# Altium PCB SPCE061A最小系统.PcbDoc (part 2 of 2)
Units mm, origin at the board's own origin, x right, y up, seen from the top; angles counter-clockwise.
Board outline 152.4 x 101.6 mm, 2 copper layers (Top Layer, Bottom Layer); 47 components, 59 nets, 230 pads, 3 vias.
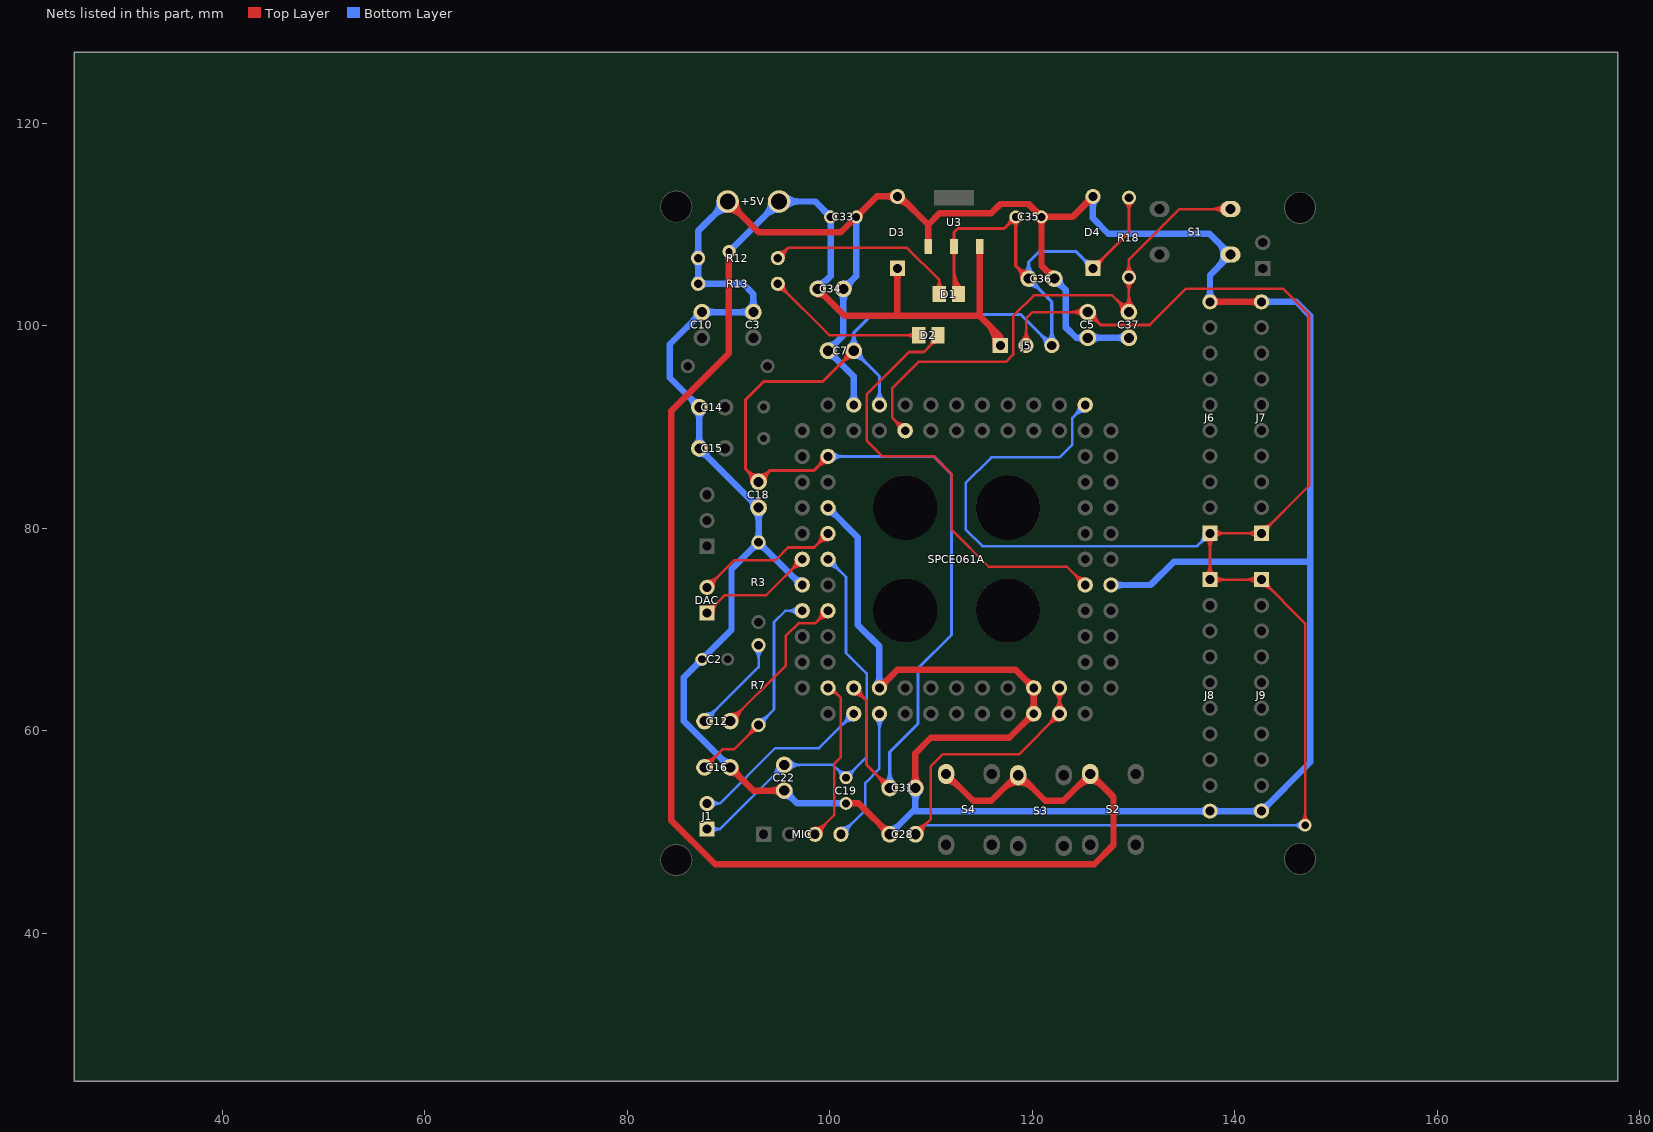
[diagram p2: the nets of this part, all layers, seen from the top]

## Via types
v1: diameter 1.27, hole 0.711, Top Layer to Bottom Layer, 3 vias

## Nets (pads, with @x,y where several pads share a name; then routed paths per layer and width w, separated by ;. In a path a pad name is that pad's centre, name@x,y a point inside that pad or via, vN(x,y) a via of type N, cw(c..) or ccw(c..) an arc to the next point about the centre after c; other vN are vias at no path point) (continued)
NetC12_1: C12.1 SPCE061A.27 | length 24.1
  Top Layer w0.254: C12.1@90.17,60.96 95.631,66.421 95.631,69.342 96.901,70.612 98.552,70.612 99.797,71.857 SPCE061A.27@99.822,71.857 ; C12.1@90.17,61.404 ccw(c90.17,62.476) 90.928,61.718 ccw(c91.686,60.96) C12.1@90.614,60.96 ; C12.1@90.17,61.658 ccw(c90.17,63.343) 91.362,62.152 ccw(c92.553,60.96) C12.1@90.868,60.96 ; 98.695,70.755 cw(c99.822,69.627) SPCE061A.27@99.822,71.222 ; 98.756,70.816 ccw(c97.715,71.857) SPCE061A.27@99.187,71.857 ; 99.128,71.188 cw(c99.822,70.494) SPCE061A.27@99.822,71.476 ; 99.19,71.25 ccw(c98.583,71.857) SPCE061A.27@99.441,71.857
NetC12_2: C12.2 R7.2 | length 17.4
  Bottom Layer w0.254: C12.2@87.63,60.96 92.964,66.294 R7.2@92.964,68.453 ; C12.2@87.63,61.404 ccw(c87.63,62.476) 88.388,61.718 ccw(c89.146,60.96) C12.2@88.074,60.96 ; C12.2@87.63,61.658 ccw(c87.63,63.343) 88.822,62.152 ccw(c90.013,60.96) C12.2@88.328,60.96 ; R7.2@92.559,68.048 cw(c91.581,67.07) 92.964,67.07 cw(c94.347,67.07) R7.2@93.369,68.048 ; R7.2@92.738,68.227 cw(c92.194,67.683) 92.964,67.683 cw(c93.734,67.683) R7.2@93.19,68.227
NetC16_1: C16.1 R7.1 SPCE061A.26 | length 36.1
  Top Layer w0.254: C16.1@87.63,56.388 89.408,58.166 90.551,58.166 R7.1@92.964,60.579 ; C16.1@87.63,56.832 ccw(c87.63,57.904) 88.388,57.146 ccw(c89.146,56.388) C16.1@88.074,56.388 ; C16.1@87.63,57.086 ccw(c87.63,58.771) 88.822,57.58 ccw(c90.013,56.388) C16.1@88.328,56.388 ; R7.1@92.391,60.579 cw(c91.008,60.579) 91.986,59.601 cw(c92.964,58.623) R7.1@92.964,60.006 ; R7.1@92.645,60.579 cw(c91.875,60.579) 92.419,60.034 cw(c92.964,59.49) R7.1@92.964,60.26
  Bottom Layer w0.254: R7.1@92.964,60.579 94.488,62.103 94.488,70.739 95.606,71.857 SPCE061A.26@97.282,71.857 ; R7.1@92.964,60.898 ccw(c92.964,61.668) 93.509,61.124 ccw(c94.053,60.579) R7.1@93.283,60.579 ; R7.1@92.964,61.152 ccw(c92.964,62.535) 93.942,61.557 ccw(c94.92,60.579) R7.1@93.537,60.579 ; SPCE061A.26@96.833,71.408 ccw(c95.749,70.324) 95.749,71.857 ccw(c95.749,73.39) SPCE061A.26@96.833,72.306 ; SPCE061A.26@97.013,71.587 ccw(c96.362,70.937) 96.362,71.857 ccw(c96.362,72.776) SPCE061A.26@97.013,72.126
NetC37_1: C37.1 R18.1 S1.1@139.565,111.521 SPCE061A.6 | length 75.5
  Top Layer w0.254: SPCE061A.6@106.807,89.637 ccw(c105.274,89.637) 106.358,90.721 ccw(c107.442,91.805) SPCE061A.6@107.442,90.272 ; SPCE061A.6@107.061,89.637 ccw(c106.141,89.637) 106.792,90.287 ccw(c107.442,90.937) SPCE061A.6@107.442,90.018 ; SPCE061A.6@107.442,89.637 106.172,90.907 106.172,93.853 108.75,96.431 117.386,96.431 118.11,97.155 118.11,100.965 120.142,102.997 127.889,102.997 C37.1@129.54,101.346 129.54,106.553 134.508,111.521 S1.1@139.565,111.521 ; C37.1@128.842,101.346 ccw(c127.157,101.346) 128.348,102.538 ccw(c129.54,103.729) C37.1@129.54,102.044 ; C37.1@129.046,101.84 ccw(c127.855,103.031) 129.54,103.031 ccw(c131.225,103.031) C37.1@130.034,101.84 ; C37.1@129.096,101.346 ccw(c128.024,101.346) 128.782,102.104 ccw(c129.54,102.862) C37.1@129.54,101.79 ; R18.1@129.135,104.37 cw(c128.157,103.392) 129.54,103.392 cw(c130.923,103.392) R18.1@129.945,104.37 ; R18.1@129.135,105.18 ccw(c128.157,106.158) 129.54,106.158 ccw(c130.923,106.158) R18.1@129.945,105.18 ; C37.1@129.226,101.66 ccw(c128.468,102.418) 129.54,102.418 ccw(c130.612,102.418) C37.1@129.854,101.66 ; R18.1@129.314,104.549 cw(c128.77,104.005) 129.54,104.005 cw(c130.31,104.005) R18.1@129.766,104.549 ; R18.1@129.314,105.001 ccw(c128.77,105.545) 129.54,105.545 ccw(c130.31,105.545) R18.1@129.766,105.001 ; S1.1@138.889,111.045 ccw(c137.74,109.896) 137.74,111.521 ccw(c137.74,113.146) S1.1@138.889,111.997 ; S1.1@139.069,111.225 ccw(c138.353,110.509) 138.353,111.521 ccw(c138.353,112.532) S1.1@139.069,111.817
NetD1_2: D1.2 R12.1 | length 24.4
  Top Layer w0.254: R12.1@94.869,106.68 95.885,107.696 107.635,107.696 110.81,104.521 ; R12.1@94.869,106.999 ccw(c94.869,107.769) 95.414,107.225 ccw(c95.958,106.68) R12.1@95.188,106.68 ; R12.1@94.869,107.253 ccw(c94.869,108.636) 95.847,107.658 ccw(c96.825,106.68) R12.1@95.442,106.68 ; D1.2@110.443,103.647 ccw(c109.585,104.521) 110.81,104.521 ; D1.2@110.81,103.124 110.81,104.521 ; D1.2@111.177,103.647 cw(c112.035,104.521) 110.81,104.521
NetD2_2: D2.2 R13.1 | length 21.4
  Top Layer w0.254: R13.1@94.869,103.567 cw(c94.869,102.184) 95.847,103.162 cw(c96.825,104.14) R13.1@95.442,104.14 ; R13.1@94.869,103.821 cw(c94.869,103.051) 95.414,103.595 cw(c95.958,104.14) R13.1@95.188,104.14 ; R13.1@94.869,104.14 99.949,99.06 D2.2@108.778,99.06 ; D2.2@108.408,98.69 ccw(c107.515,97.797) 107.515,99.06 ccw(c107.515,100.323) D2.2@108.408,99.43
NetDAC_input_1: DAC.1 SPCE061A.22 | length 19.2
  Top Layer w0.254: DAC.1@87.884,71.628 89.662,73.406 93.726,73.406 97.257,76.937 SPCE061A.22@97.282,76.937 ; DAC.1@87.884,71.997 ccw(c87.884,72.888) 88.514,72.258 ccw(c89.144,71.628) DAC.1@88.253,71.628 ; DAC.1@87.884,72.251 ccw(c87.884,73.755) 88.948,72.692 ccw(c90.011,71.628) DAC.1@88.507,71.628 ; 96.155,75.835 cw(c97.282,74.707) SPCE061A.22@97.282,76.302 ; 96.216,75.896 ccw(c95.175,76.937) SPCE061A.22@96.647,76.937 ; 96.588,76.268 cw(c97.282,75.574) SPCE061A.22@97.282,76.556 ; 96.65,76.33 ccw(c96.043,76.937) SPCE061A.22@96.901,76.937
NetDAC_input_2: DAC.2 SPCE061A.21 | length 21.8
  Top Layer w0.254: DAC.2@87.884,74.168 90.551,76.835 94.615,76.835 95.885,78.105 98.45,78.105 SPCE061A.21@99.822,79.477 ; DAC.2@87.884,74.537 ccw(c87.884,75.428) 88.514,74.798 ccw(c89.144,74.168) DAC.2@88.253,74.168 ; DAC.2@87.884,74.791 ccw(c87.884,76.295) 88.948,75.232 ccw(c90.011,74.168) DAC.2@88.507,74.168 ; SPCE061A.21@99.187,79.477 cw(c97.654,79.477) 98.738,78.393 cw(c99.822,77.309) SPCE061A.21@99.822,78.842 ; SPCE061A.21@99.441,79.477 cw(c98.521,79.477) 99.172,78.826 cw(c99.822,78.176) SPCE061A.21@99.822,79.096
NetJ1_2: J1.2 SPCE061A.35 | length 24.9
  Bottom Layer w0.254: J1.2@87.884,52.832 89.154,52.832 ; J1.2@88.176,52.606 cw(c88.636,52.25) 88.636,52.832 cw(c88.636,53.414) J1.2@88.176,53.058 ; J1.2@88.377,52.451 cw(c89.154,51.849) 89.154,52.832 ; J1.2@88.377,53.213 ccw(c89.154,53.815) 89.154,52.832 ; 101.235,60.595 cw(c102.362,59.467) SPCE061A.35@102.362,61.062 ; 101.296,60.656 ccw(c100.255,61.697) SPCE061A.35@101.727,61.697 ; 101.668,61.028 cw(c102.362,60.334) SPCE061A.35@102.362,61.316 ; 101.73,61.09 ccw(c101.123,61.697) SPCE061A.35@101.981,61.697 ; SPCE061A.35@102.362,61.697 102.337,61.697 98.933,58.293 94.615,58.293 89.154,52.832
SLEEP: D2.1 SPCE061A.63 | length 51.5
  Top Layer w0.254: 109.712,97.84 ccw(c108.641,98.91) D2.1@110.155,98.91 ; 109.963,98.091 cw(c110.678,97.375) D2.1@110.678,98.387 ; D2.1@110.145,98.273 ccw(c109.509,98.91) D2.1@110.409,98.91 ; D2.1@110.678,99.06 110.678,98.806 109.281,97.409 107.823,97.409 103.632,93.218 103.632,88.646 105.156,87.122 110.236,87.122 112.047,85.311 112.047,79.85 115.697,76.2 123.444,76.2 125.222,74.422 SPCE061A.63@125.222,74.397 ; 124.12,75.524 cw(c122.993,74.397) SPCE061A.63@124.587,74.397 ; 124.181,75.463 ccw(c125.222,76.503) SPCE061A.63@125.222,75.032 ; 124.554,75.09 cw(c123.86,74.397) SPCE061A.63@124.841,74.397 ; 124.615,75.029 ccw(c125.222,75.636) SPCE061A.63@125.222,74.778
  Bottom Layer w0.254: SPCE061A.63@125.222,74.397 SPCE061A.63@125.222,74.422
V5: +5V.2 C33.1 C34.2 D3.2 J5.1 S2.1@125.715,55.745 S3.1@118.603,55.618 S4.1@111.491,55.745 U3.3 | length 213.2
  Top Layer w0.635: v1@89.818,107.09 cw(c89.276,106.548) 90.043,106.548 cw(c90.81,106.548) v1@90.268,107.09 ; v1(90.043,107.315) 90.043,97.282 84.328,91.567 84.328,51.181 88.692,46.817 126.111,46.817 128.016,48.722 128.016,53.467 125.738,55.745 S2.1@125.715,55.745 123.056,53.086 121.285,53.086 S3.1@118.626,55.745 ; C34.2@98.806,103.124 cw(c98.806,101.899) 99.672,102.766 cw(c100.539,103.632) C34.2@99.314,103.632 ; C34.2@98.806,103.632 101.473,100.965 114.808,100.965 ; D3.2@106.374,105.364 cw(c105.636,104.626) 106.68,104.626 cw(c107.724,104.626) D3.2@106.986,105.364 ; 106.68,100.965 D3.2@106.68,105.67 ; S4.1@111.491,55.062 cw(c111.491,53.36) 112.695,54.564 ; S4.1@111.514,55.745 114.173,53.086 115.944,53.086 118.603,55.745 S3.1@118.603,55.738 ; U3.3@114.808,107.823 114.808,100.965 ; 115.473,100.3 cw(c113.217,98.044) J5.1@116.408,98.044 ; 116.557,99.216 cw(c115.385,98.044) J5.1@117.043,98.044 ; J5.1@116.573,98.384 ccw(c116.143,98.933) 116.84,98.933 ; J5.1@116.84,98.044 116.84,98.933 ; J5.1@117.107,98.384 cw(c117.537,98.933) 116.84,98.933 ; 117.221,54.363 cw(c118.603,52.981) 118.603,54.935 cw(c118.603,52.926) 120.024,54.347 ; 124.55,54.58 cw(c125.715,53.415) 125.715,55.062 cw(c125.715,53.36) 126.919,54.564 ; 125.033,55.063 ccw(c124.551,55.545) S2.1@125.233,55.545 ; 114.808,100.965 116.84,98.933
  Bottom Layer w0.635: v1(90.043,107.315) +5V.2@94.996,112.268 98.552,112.268 C33.1@100.076,110.744 100.076,104.902 C34.2@98.806,103.632 ; v1@90.043,107.632 ccw(c90.043,108.399) 90.585,107.857 ccw(c91.127,107.315) v1@90.361,107.315 ; +5V.2@94.202,112.268 cw(c92.283,112.268) 93.64,110.912 cw(c94.996,109.555) +5V.2@94.996,111.474 ; +5V.2@95.558,111.706 cw(c96.914,110.35) 96.914,112.268 cw(c96.914,114.186) +5V.2@95.558,112.83 ; C34.2@98.806,104.14 ccw(c98.806,105.365) 99.672,104.498 ccw(c100.539,103.632) C34.2@99.314,103.632 ; C33.1@99.758,110.744 ccw(c98.992,110.744) 99.534,111.286 ccw(c100.076,111.828) C33.1@100.076,111.061 ; C33.1@99.851,110.519 cw(c99.309,109.977) 100.076,109.977 cw(c100.843,109.977) C33.1@100.301,110.519
VCM: MIC.3 SPCE061A.34 | length 22
  Top Layer w0.254: MIC.3@98.425,49.53 MIC.3@98.425,49.784 ; MIC.3@98.552,49.784 100.433,51.665 100.433,56.745 101.092,57.404 101.092,63.246 100.101,64.237 SPCE061A.34@99.822,64.237 ; MIC.3@98.552,50.153 ccw(c98.552,51.044) 99.182,50.414 ccw(c99.812,49.784) MIC.3@98.921,49.784 ; MIC.3@98.552,50.407 ccw(c98.552,51.911) 99.616,50.848 ccw(c100.679,49.784) MIC.3@99.175,49.784 ; SPCE061A.34@99.854,63.857 cw(c99.957,62.607) 100.844,63.494 ; SPCE061A.34@100.457,64.237 ccw(c101.315,64.237) 100.708,63.63
VDD: C7.2 C18.2 C31.2 C35.1 C36.2 D1.1 D4.2 J5.3 R18.2 SPCE061A.7 SPCE061A.15 SPCE061A.36 U3.2 | length 232.1
  Top Layer w0.305: C18.2@92.291,84.582 ccw(c90.668,84.582) 91.816,85.73 ccw(c92.964,86.878) C18.2@92.964,85.255 ; C18.2@92.596,84.582 ccw(c91.708,84.582) 92.336,85.21 ccw(c92.964,85.838) C18.2@92.964,84.95 ; C18.2@92.965,84.95 ccw(c92.968,85.828) 93.589,85.207 ccw(c94.21,84.586) C18.2@93.332,84.583 ; C18.2@92.966,85.255 ccw(c92.971,86.86) 94.107,85.725 ; C18.2@93.637,84.584 cw(c95.242,84.589) 94.107,85.725 ; SPCE061A.15@99.212,87.097 cw(c97.741,87.097) 98.781,86.056 cw(c99.822,85.015) SPCE061A.15@99.822,86.487 ; SPCE061A.15@99.822,87.097 98.45,85.725 94.107,85.725 ; C7.2@101.689,97.536 cw(c100.066,97.536) 101.214,96.388 cw(c102.362,95.24) C7.2@102.362,96.863 ; C7.2@101.994,97.536 cw(c101.106,97.536) 101.734,96.908 cw(c102.362,96.28) C7.2@102.362,97.168 ; SPCE061A.36@102.362,63.627 cw(c102.362,62.094) 103.446,63.178 ; SPCE061A.36@102.362,63.932 cw(c102.362,63.135) 102.926,63.698 ; SPCE061A.36@102.362,64.237 102.387,64.237 103.632,62.992 103.632,56.642 C31.2@105.918,54.356 ; C7.2@102.362,97.536 99.314,94.488 93.472,94.488 91.694,92.71 91.694,85.852 C18.2@92.964,84.582 94.107,85.725 ; SPCE061A.36@102.972,64.237 ccw(c104.382,64.237) 103.385,63.239 ; SPCE061A.7@104.877,92.177 SPCE061A.7@104.902,92.177 ; C31.2@105.245,54.356 ccw(c103.622,54.356) 104.77,55.504 ccw(c105.918,56.652) C31.2@105.918,55.029 ; C31.2@105.55,54.356 ccw(c104.662,54.356) 105.29,54.984 ccw(c105.918,55.612) C31.2@105.918,54.724 ; U3.2@112.106,107.28 cw(c111.716,106.89) 112.268,106.89 cw(c112.82,106.89) U3.2@112.43,107.28 ; U3.2@112.106,108.366 ccw(c111.716,108.756) 112.268,108.756 ccw(c112.82,108.756) U3.2@112.43,108.366 ; 112.268,104.071 ccw(c113.507,104.071) D1.1@112.631,103.195 ; 112.268,104.807 ccw(c114.243,104.807) D1.1@112.846,103.41 ; 112.268,105.542 ccw(c114.978,105.542) D1.1@113.062,103.626 ; D1.1@112.71,103.124 112.268,103.566 112.268,109.22 112.653,109.605 117.225,109.605 C35.1@118.364,110.744 118.364,105.918 C36.2@119.634,104.648 ; C35.1@117.881,110.744 cw(c116.716,110.744) 117.54,109.92 cw(c118.364,109.096) C35.1@118.364,110.261 ; C35.1@118.023,110.403 cw(c117.199,109.579) 118.364,109.579 cw(c119.529,109.579) C35.1@118.705,110.403 ; C36.2@118.961,104.648 ccw(c117.338,104.648) 118.486,105.796 ccw(c119.634,106.944) C36.2@119.634,105.321 ; C36.2@119.266,104.648 ccw(c118.378,104.648) 119.006,105.276 ccw(c119.634,105.904) C36.2@119.634,105.016 ; D4.2@125.984,105.67 129.54,109.226 R18.2@129.54,112.649 ; D4.2@125.984,106.268 ccw(c125.984,107.71) 127.004,106.69 ccw(c128.024,105.67) D4.2@126.582,105.67 ; R18.2@129.153,112.262 cw(c128.218,111.327) 129.54,111.327 cw(c130.862,111.327) R18.2@129.927,112.262
  Bottom Layer w0.305: SPCE061A.15@99.822,87.097 110.261,87.097 112.014,85.344 112.014,69.469 108.712,66.167 108.712,60.706 105.918,57.912 C31.2@105.918,54.356 ; SPCE061A.15@100.253,86.666 cw(c101.294,85.625) 101.294,87.097 cw(c101.294,88.568) SPCE061A.15@100.253,87.528 ; C7.2@101.886,98.012 ccw(c100.738,99.16) 102.362,99.16 ccw(c103.986,99.16) C7.2@102.838,98.012 ; C7.2@102.102,97.796 ccw(c101.474,98.424) 102.362,98.424 ccw(c103.25,98.424) C7.2@102.622,97.796 ; C7.2@102.362,96.863 cw(c102.362,95.24) 103.51,96.388 cw(c104.658,97.536) C7.2@103.035,97.536 ; C7.2@102.362,97.168 cw(c102.362,96.28) 102.99,96.908 cw(c103.618,97.536) C7.2@102.73,97.536 ; SPCE061A.7@104.471,92.608 ccw(c103.43,93.648) 104.902,93.648 ccw(c106.374,93.648) SPCE061A.7@105.333,92.608 ; SPCE061A.7@104.902,92.177 104.902,94.996 C7.2@102.362,97.536 102.362,99.314 104.14,101.092 118.872,101.092 J5.3@121.92,98.044 121.92,102.362 C36.2@119.634,104.648 ; C31.2@105.442,54.832 ccw(c104.294,55.98) 105.918,55.98 ccw(c107.542,55.98) C31.2@106.394,54.832 ; C31.2@105.658,54.616 ccw(c105.03,55.244) 105.918,55.244 ccw(c106.806,55.244) C31.2@106.178,54.616 ; C36.2@119.158,105.124 ccw(c118.01,106.272) 119.634,106.272 ccw(c121.258,106.272) C36.2@120.11,105.124 ; C36.2@119.374,104.908 ccw(c118.746,105.536) 119.634,105.536 ccw(c120.522,105.536) C36.2@119.894,104.908 ; C36.2@119.634,103.975 cw(c119.634,102.352) 120.782,103.5 cw(c121.93,104.648) C36.2@120.307,104.648 ; C36.2@119.634,104.28 cw(c119.634,103.392) 120.262,104.02 cw(c120.89,104.648) C36.2@120.002,104.648 ; C36.2@119.761,104.648 C36.2@119.634,104.648 ; J5.3@121.322,98.044 ccw(c119.88,98.044) 120.9,99.064 ccw(c121.92,100.084) J5.3@121.92,98.642 ; J5.3@121.497,98.467 ccw(c120.477,99.487) 121.92,99.487 ccw(c123.363,99.487) J5.3@122.343,98.467 ; D4.2@125.386,105.67 ccw(c123.944,105.67) 124.964,106.69 ccw(c125.984,107.71) D4.2@125.984,106.268 ; D4.2@125.984,105.67 124.339,107.315 120.65,107.315 119.634,106.299 C36.2@119.634,104.648
VDDH: C5.2 C28.2 J5.2 J6.1 J7.1 J8.1 J9.1 SPCE061A.51 SPCE061A.52 SPCE061A.75 | length 279.8
  Top Layer w0.254: C28.2@108.458,49.784 109.982,51.308 109.982,56.515 111.144,57.677 118.662,57.677 SPCE061A.51@122.682,61.697 SPCE061A.52@122.682,64.237 ; C28.2@108.458,50.228 ccw(c108.458,51.3) 109.216,50.542 ccw(c109.974,49.784) C28.2@108.902,49.784 ; C28.2@108.458,50.482 ccw(c108.458,52.167) 109.65,50.976 ccw(c110.841,49.784) C28.2@109.156,49.784 ; J5.2@118.939,98.485 ccw(c117.876,99.548) 119.38,99.548 ccw(c120.884,99.548) J5.2@119.821,98.485 ; J5.2@119.119,98.305 ccw(c118.489,98.935) 119.38,98.935 ccw(c120.271,98.935) J5.2@119.641,98.305 ; J5.2@119.38,98.044 119.38,100.711 120.015,101.346 C5.2@125.476,101.346 126.746,100.076 131.572,100.076 135.128,103.632 144.78,103.632 147.32,101.092 147.32,84.201 J7.1@142.621,79.502 J6.1@137.541,79.502 J8.1@137.541,74.93 J9.1@142.621,74.93 146.939,70.612 v1(146.939,50.673) ; SPCE061A.51@122.047,61.697 cw(c120.514,61.697) 121.598,60.613 cw(c122.682,59.529) SPCE061A.51@122.682,61.062 ; SPCE061A.51@122.233,62.146 ccw(c121.149,63.23) 122.682,63.23 ccw(c124.215,63.23) SPCE061A.51@123.131,62.146 ; SPCE061A.52@122.233,63.788 cw(c121.149,62.704) 122.682,62.704 cw(c124.215,62.704) SPCE061A.52@123.131,63.788 ; SPCE061A.51@122.301,61.697 cw(c121.381,61.697) 122.032,61.046 cw(c122.682,60.396) SPCE061A.51@122.682,61.316 ; SPCE061A.51@122.413,61.966 ccw(c121.762,62.616) 122.682,62.616 ccw(c123.602,62.616) SPCE061A.51@122.951,61.966 ; SPCE061A.52@122.413,63.967 cw(c121.762,63.317) 122.682,63.317 cw(c123.602,63.317) SPCE061A.52@122.951,63.967 ; C5.2@124.982,100.852 ccw(c123.791,99.661) 123.791,101.346 ccw(c123.791,103.031) C5.2@124.982,101.84 ; C5.2@125.162,101.032 ccw(c124.404,100.274) 124.404,101.346 ccw(c124.404,102.418) C5.2@125.162,101.66 ; C5.2@125.476,100.648 cw(c125.476,98.963) 126.668,100.154 cw(c127.859,101.346) C5.2@126.174,101.346 ; C5.2@125.476,100.902 cw(c125.476,99.83) 126.234,100.588 cw(c126.992,101.346) C5.2@125.92,101.346 ; J8.1@137.1,75.371 ccw(c136.037,76.434) 137.541,76.434 ccw(c139.045,76.434) 137.982,75.371 ccw(c139.045,76.434) 139.045,74.93 ccw(c139.045,73.426) J8.1@137.982,74.489 ; J6.1@137.1,79.061 cw(c136.037,77.998) 137.541,77.998 cw(c139.045,77.998) 137.982,79.061 cw(c139.045,77.998) 139.045,79.502 cw(c139.045,81.006) J6.1@137.982,79.943 ; J8.1@137.28,75.191 ccw(c136.65,75.821) 137.541,75.821 ccw(c138.432,75.821) 137.802,75.191 ccw(c138.432,75.821) 138.432,74.93 ccw(c138.432,74.039) J8.1@137.802,74.669 ; J6.1@137.28,79.241 cw(c136.65,78.611) 137.541,78.611 cw(c138.432,78.611) 137.802,79.241 cw(c138.432,78.611) 138.432,79.502 cw(c138.432,80.393) J6.1@137.802,79.763 ; J9.1@142.18,74.489 ccw(c141.117,73.426) 141.117,74.93 ccw(c141.117,76.434) J9.1@142.18,75.371 ; J7.1@142.18,79.061 ccw(c141.117,77.998) 141.117,79.502 ccw(c141.117,81.006) J7.1@142.18,79.943 ; J9.1@142.36,74.669 ccw(c141.73,74.039) 141.73,74.93 ccw(c141.73,75.821) J9.1@142.36,75.191 ; J7.1@142.36,79.241 ccw(c141.73,78.611) 141.73,79.502 ccw(c141.73,80.393) J7.1@142.36,79.763 ; J9.1@142.621,74.307 cw(c142.621,72.803) 143.685,73.866 cw(c144.748,74.93) J9.1@143.244,74.93 ; J9.1@142.621,74.561 cw(c142.621,73.67) 143.251,74.3 cw(c143.881,74.93) J9.1@142.99,74.93 ; J7.1@142.621,79.871 ccw(c142.621,80.762) 143.251,80.132 ccw(c143.881,79.502) J7.1@142.99,79.502 ; J7.1@142.621,80.125 ccw(c142.621,81.629) 143.685,80.566 ccw(c144.748,79.502) J7.1@143.244,79.502 ; v1@146.58,51.032 ccw(c145.713,51.899) 146.939,51.899 ccw(c148.165,51.899) v1@147.298,51.032
  Bottom Layer w0.254: C28.2@108.458,49.784 109.347,50.673 ; C28.2@108.616,50.464 ccw(c108.793,51.227) 109.347,50.673 ; C28.2@109.138,49.942 cw(c109.901,50.119) 109.347,50.673 ; SPCE061A.75@124.587,92.177 cw(c123.054,92.177) 124.138,91.093 cw(c125.222,90.009) SPCE061A.75@125.222,91.542 ; SPCE061A.75@124.841,92.177 cw(c123.921,92.177) 124.572,91.526 cw(c125.222,90.876) SPCE061A.75@125.222,91.796 ; SPCE061A.75@125.222,92.177 123.952,90.907 123.952,88.265 122.682,86.995 115.951,86.995 113.411,84.455 113.411,79.883 115.062,78.232 136.271,78.232 J6.1@137.541,79.502 ; J6.1@136.918,79.502 cw(c135.414,79.502) 136.477,78.438 cw(c137.541,77.375) J6.1@137.541,78.879 ; J6.1@137.172,79.502 cw(c136.281,79.502) 136.911,78.872 cw(c137.541,78.242) J6.1@137.541,79.133 ; v1@146.58,50.314 ccw(c145.713,49.447) 145.713,50.673 ccw(c145.713,51.899) v1@146.58,51.032 ; v1(146.939,50.673) 109.347,50.673
VMIC: MIC.4 SPCE061A.37 | length 21.1
  Bottom Layer w0.254: MIC.4@101.092,49.784 103.505,52.197 103.505,54.864 104.902,56.261 SPCE061A.37@104.902,61.697 ; MIC.4@101.092,50.153 ccw(c101.092,51.044) 101.722,50.414 ccw(c102.352,49.784) MIC.4@101.461,49.784 ; MIC.4@101.092,50.407 ccw(c101.092,51.911) 102.156,50.848 ccw(c103.219,49.784) MIC.4@101.715,49.784 ; SPCE061A.37@104.453,61.248 cw(c103.369,60.164) 104.902,60.164 cw(c106.435,60.164) SPCE061A.37@105.351,61.248 ; SPCE061A.37@104.633,61.427 cw(c103.982,60.777) 104.902,60.777 cw(c105.822,60.777) SPCE061A.37@105.171,61.427
VREF2: C19.1 C22.2 J1.1 SPCE061A.23 | length 60.2
  Bottom Layer w0.254: J1.1@87.884,50.292 89.154,50.292 ; J1.1@88.176,50.066 cw(c88.636,49.71) 88.636,50.292 cw(c88.636,50.874) J1.1@88.176,50.518 ; J1.1@88.377,49.911 cw(c89.154,49.309) 89.154,50.292 ; J1.1@88.377,50.673 ccw(c89.154,51.275) 89.154,50.292 ; C22.2@94.806,56.642 cw(c93.121,56.642) 94.312,55.45 cw(c95.504,54.259) C22.2@95.504,55.944 ; C22.2@95.06,56.642 cw(c93.988,56.642) 94.746,55.884 cw(c95.504,55.126) C22.2@95.504,56.198 ; C22.2@95.818,56.328 cw(c96.576,55.57) 96.576,56.642 cw(c96.576,57.714) C22.2@95.818,56.956 ; C22.2@95.998,56.148 cw(c97.189,54.957) 97.189,56.642 cw(c97.189,58.327) C22.2@95.998,57.136 ; SPCE061A.23@99.822,76.302 cw(c99.822,74.707) 100.949,75.835 ; SPCE061A.23@99.822,76.556 cw(c99.822,75.574) 100.516,76.268 ; SPCE061A.23@99.822,76.937 99.847,76.937 101.6,75.184 101.6,67.691 103.632,65.659 103.632,57.404 C19.1@101.6,55.372 ; SPCE061A.23@100.203,76.937 ccw(c101.061,76.937) 100.454,76.33 ; SPCE061A.23@100.457,76.937 ccw(c101.929,76.937) 100.888,75.896 ; C19.1@101.092,55.372 ccw(c99.866,55.372) 100.733,56.239 ccw(c101.6,57.106) 101.6,55.88 ccw(c101.6,57.106) 102.467,56.239 ccw(c103.334,55.372) C19.1@102.108,55.372 ; C19.1@101.727,55.372 C19.1@101.6,55.372 ; 89.154,50.292 C22.2@95.504,56.642 100.33,56.642 C19.1@101.6,55.372
VSS: +5V.1 C2.2 C3.1 C5.1 C7.1 C10.1 C14.1 C15.2 C16.2 C18.1 C19.2 C22.1 C28.1 C31.1 C33.2 C34.1 C35.2 C36.1 C37.2 D3.1 D4.1 J6.10 J7.10 J8.10 J9.10 R3.2 R12.2 R13.2 S1.2@139.565,107.021 SPCE061A.9 SPCE061A.19 SPCE061A.24 SPCE061A.38 SPCE061A.49 SPCE061A.50 SPCE061A.62 U3.1 | length 505.3
  Top Layer w0.635: +5V.1@89.916,111.474 cw(c89.916,109.555) 91.272,110.912 cw(c92.629,112.268) +5V.1@90.71,112.268 ; +5V.1@89.916,112.268 92.964,109.22 101.092,109.22 104.642,112.77 D3.1@106.68,112.77 ; C16.2@90.17,55.881 cw(c90.17,54.655) 91.036,55.522 cw(c91.903,56.388) C16.2@90.677,56.388 ; C16.2@90.17,56.388 92.456,54.102 C22.1@95.504,54.102 ; C22.1@95.145,53.743 ccw(c94.279,52.877) 94.279,54.102 ccw(c94.279,55.327) C22.1@95.145,54.461 ; C19.2@101.6,52.832 102.87,52.832 C28.1@105.918,49.784 ; C19.2@101.825,52.607 cw(c102.367,52.065) 102.367,52.832 cw(c102.367,53.599) C19.2@101.825,53.057 ; C33.2@102.298,110.744 cw(c101.532,110.744) 102.074,110.202 cw(c102.616,109.66) C33.2@102.616,110.426 ; C33.2@102.616,111.061 ccw(c102.616,111.828) 103.158,111.286 ccw(c103.7,110.744) C33.2@102.933,110.744 ; SPCE061A.38@104.902,64.237 104.902,64.262 106.68,66.04 118.339,66.04 SPCE061A.50@120.142,64.237 SPCE061A.49@120.142,61.697 120.117,61.697 117.729,59.309 109.982,59.309 108.458,57.785 C31.1@108.458,54.356 ; SPCE061A.38@104.902,64.681 ccw(c104.902,65.693) 105.617,64.977 ; SPCE061A.38@105.346,64.237 cw(c106.481,64.237) 105.679,65.039 ; C28.1@105.411,49.784 ccw(c104.185,49.784) 105.052,50.65 ccw(c105.918,51.517) C28.1@105.918,50.291 ; D3.1@106.374,112.464 ccw(c105.636,111.726) 105.636,112.77 ccw(c105.636,113.814) D3.1@106.374,113.076 ; D3.1@106.68,112.338 cw(c106.68,110.666) 107.862,111.848 ; D3.1@106.94,112.77 109.728,109.982 ; C31.1@108.099,54.715 ccw(c107.233,55.581) 108.458,55.581 ccw(c109.683,55.581) C31.1@108.817,54.715 ; U3.1@109.728,107.823 109.728,109.982 ; 119.34,60.92 cw(c120.142,60.118) SPCE061A.49@120.142,61.252 ; 119.401,60.981 ccw(c118.686,61.697) SPCE061A.49@119.697,61.697 ; SPCE061A.50@119.697,64.237 ccw(c118.624,64.237) 119.383,64.995 ccw(c120.142,65.754) SPCE061A.50@120.142,64.681 ; SPCE061A.49@119.828,62.011 ccw(c119.069,62.77) 120.142,62.77 ccw(c121.215,62.77) SPCE061A.49@120.456,62.011 ; SPCE061A.50@119.828,63.922 cw(c119.069,63.163) 120.142,63.163 cw(c121.215,63.163) SPCE061A.50@120.456,63.922 ; C35.2@120.587,110.744 ccw(c119.82,110.744) 120.362,111.286 ccw(c120.904,111.828) C35.2@120.904,111.061 ; C35.2@120.679,110.519 cw(c120.137,109.977) 120.904,109.977 cw(c121.671,109.977) 121.129,110.519 cw(c121.671,109.977) 121.671,110.744 cw(c121.671,111.511) C35.2@121.129,110.969 ; C36.1@121.667,104.648 ccw(c120.441,104.648) 121.308,105.514 ccw(c122.174,106.381) C36.1@122.174,105.155 ; C36.1@122.174,104.648 120.904,105.918 C35.2@120.904,110.744 ; D4.1@125.552,112.77 cw(c124.507,112.77) 125.246,112.032 cw(c125.984,111.293) D4.1@125.984,112.338 ; D4.1@125.984,112.77 123.958,110.744 C35.2@120.904,110.744 ; J6.10@137.541,102.362 J7.10@142.621,102.362 ; J6.10@137.847,102.056 cw(c138.585,101.318) 138.585,102.362 cw(c138.585,103.406) J6.10@137.847,102.668 ; J7.10@142.315,102.056 ccw(c141.577,101.318) 141.577,102.362 ccw(c141.577,103.406) J7.10@142.315,102.668 ; 109.728,109.982 110.871,111.125 115.951,111.125 116.849,112.023 119.625,112.023 C35.2@120.904,110.744
  Bottom Layer w0.635: C14.1@86.615,91.948 ccw(c85.389,91.948) 86.256,92.814 ccw(c87.122,93.681) C14.1@87.122,92.455 ; R13.2@86.725,104.41 ccw(c86.072,105.063) 86.995,105.063 ccw(c87.918,105.063) 87.265,104.41 ccw(c87.918,105.063) 87.918,104.14 ccw(c87.918,103.217) R13.2@87.265,103.87 ; R12.2@86.725,106.41 cw(c86.072,105.757) 86.995,105.757 cw(c87.918,105.757) R12.2@87.265,106.41 ; R12.2@86.725,106.95 ccw(c86.072,107.603) 86.995,107.603 ccw(c87.918,107.603) R12.2@87.265,106.95 ; C15.2@86.763,88.243 ccw(c85.897,89.109) 87.122,89.109 ccw(c88.347,89.109) C15.2@87.481,88.243 ; C14.1@86.763,91.589 cw(c85.897,90.723) 87.122,90.723 cw(c88.347,90.723) C14.1@87.481,91.589 ; C10.1@86.869,101.346 cw(c85.643,101.346) 86.51,100.48 cw(c87.376,99.613) C10.1@87.376,100.839 ; C2.2@87.058,67.056 cw(c86.292,67.056) 86.834,66.514 cw(c87.376,65.972) C2.2@87.376,66.739 ; C15.2@87.122,87.377 cw(c87.122,86.151) 87.988,87.018 cw(c88.855,87.884) C15.2@87.629,87.884 ; C2.2@87.376,67.373 ccw(c87.376,68.14) 87.918,67.598 ccw(c88.46,67.056) C2.2@87.694,67.056 ; C10.1@87.735,100.987 cw(c88.601,100.121) 88.601,101.346 cw(c88.601,102.571) C10.1@87.735,101.705 ; +5V.1@89.122,112.268 cw(c87.203,112.268) 88.56,110.912 cw(c89.916,109.555) +5V.1@89.916,111.474 ; C16.2@89.663,56.388 ccw(c88.437,56.388) 89.304,57.254 ccw(c90.17,58.121) C16.2@90.17,56.895 ; +5V.1@89.916,112.268 86.995,109.347 R13.2@86.995,104.14 91.44,104.14 92.456,103.124 C3.1@92.456,101.346 C10.1@87.376,101.346 84.201,98.171 84.201,94.869 C14.1@87.122,91.948 C15.2@87.122,87.884 C18.1@92.964,82.042 R3.2@92.964,78.613 ; C16.2@90.17,56.388 85.557,61.001 85.591,61.034 85.591,65.271 90.297,69.977 90.297,75.946 R3.2@92.964,78.613 ; C3.1@92.097,100.987 ccw(c91.231,100.121) 91.231,101.346 ccw(c91.231,102.571) 92.097,101.705 ccw(c91.231,102.571) 92.456,102.571 ccw(c93.681,102.571) C3.1@92.815,101.705 ; C18.1@92.457,82.042 ccw(c91.231,82.042) 92.098,82.908 ccw(c92.964,83.775) C18.1@92.964,82.549 ; R3.2@92.582,78.613 cw(c91.658,78.613) 92.311,77.96 cw(c92.964,77.307) 92.964,78.231 cw(c92.964,77.307) 93.617,77.96 cw(c94.27,78.613) R3.2@93.346,78.613 ; C18.1@92.605,81.683 cw(c91.739,80.817) 92.964,80.817 cw(c94.189,80.817) C18.1@93.323,81.683 ; R3.2@92.694,78.883 ccw(c92.041,79.536) 92.964,79.536 ccw(c93.887,79.536) R3.2@93.234,78.883 ; C22.1@95.504,53.595 cw(c95.504,52.369) 96.37,53.236 cw(c97.237,54.102) C22.1@96.011,54.102 ; C22.1@95.504,54.102 96.774,52.832 C19.2@101.6,52.832 ; 96.35,75.227 ccw(c97.282,76.16) SPCE061A.24@97.282,74.841 ; 96.595,74.982 cw(c96.01,74.397) SPCE061A.24@96.837,74.397 ; SPCE061A.24@97.282,74.397 97.18,74.397 R3.2@92.964,78.613 ; SPCE061A.19@99.822,81.572 cw(c99.822,80.438) 100.624,81.24 ; SPCE061A.19@99.822,82.017 99.847,82.017 102.743,79.121 102.743,70.485 104.902,68.326 SPCE061A.38@104.902,64.262 ; C7.1@99.822,97.029 cw(c99.822,95.803) 100.688,96.67 cw(c101.555,97.536) 100.329,97.536 cw(c101.555,97.536) 100.688,98.402 cw(c99.822,99.269) C7.1@99.822,98.043 ; SPCE061A.19@100.266,82.017 ccw(c101.278,82.017) 100.563,81.301 ; C34.1@100.987,103.273 cw(c100.121,102.407) 101.346,102.407 cw(c102.571,102.407) C34.1@101.705,103.273 ; C34.1@101.346,104.139 ccw(c101.346,105.365) 102.212,104.498 ccw(c103.079,103.632) C34.1@101.853,103.632 ; C19.2@101.375,52.607 ccw(c100.833,52.065) 100.833,52.832 ccw(c100.833,53.599) C19.2@101.375,53.057 ; SPCE061A.9@102.048,92.491 ccw(c101.289,93.25) 102.362,93.25 ccw(c103.435,93.25) SPCE061A.9@102.676,92.491 ; SPCE061A.9@102.362,92.177 102.362,94.996 C7.1@99.822,97.536 101.346,99.06 C34.1@101.346,103.632 102.616,104.902 C33.2@102.616,110.744 ; C33.2@102.391,110.519 cw(c101.849,109.977) 102.616,109.977 cw(c103.383,109.977) C33.2@102.841,110.519 ; SPCE061A.38@104.588,64.551 ccw(c103.829,65.31) 104.902,65.31 ccw(c105.975,65.31) SPCE061A.38@105.216,64.551 ; C28.1@105.918,49.784 108.204,52.07 J9.10@142.621,52.07 147.447,56.896 147.447,100.965 146.05,102.362 J7.10@142.621,102.362 ; C28.1@105.918,50.291 ccw(c105.918,51.517) 106.784,50.65 ccw(c107.651,49.784) C28.1@106.425,49.784 ; C31.1@108.099,53.997 cw(c107.233,53.131) 108.458,53.131 cw(c109.683,53.131) C31.1@108.817,53.997 ; 108.458,52.07 C31.1@108.458,54.356 ; C36.1@122.174,104.141 cw(c122.174,102.915) 123.04,103.782 cw(c123.907,104.648) C36.1@122.681,104.648 ; C36.1@122.174,104.648 123.317,103.505 123.317,99.822 124.333,98.806 ; C5.1@125.1,98.466 ccw(c124.333,97.773) 124.333,98.806 ; C5.1@125.1,99.146 cw(c124.333,99.839) 124.333,98.806 ; D4.1@125.678,112.464 cw(c124.94,111.726) 125.984,111.726 cw(c127.028,111.726) D4.1@126.29,112.464 ; C5.1@125.835,98.447 cw(c126.701,97.581) 126.701,98.806 cw(c126.701,100.031) C5.1@125.835,99.165 ; D4.1@125.984,112.77 125.984,110.617 127.508,109.093 137.493,109.093 S1.2@139.565,107.021 137.541,104.997 J6.10@137.541,102.362 ; SPCE061A.62@127.762,74.397 131.674,74.397 133.985,76.708 147.447,76.708 ; SPCE061A.62@128.076,74.082 cw(c128.835,73.323) 128.835,74.397 cw(c128.835,75.47) SPCE061A.62@128.076,74.711 ; C37.2@129.181,98.447 ccw(c128.315,97.581) 128.315,98.806 ccw(c128.315,100.031) C37.2@129.181,99.165 ; C37.2@129.54,98.806 124.333,98.806 ; J8.10@137.235,51.764 ccw(c136.497,51.026) 136.497,52.07 ccw(c136.497,53.114) J8.10@137.235,52.376 ; J6.10@137.235,102.668 ccw(c136.497,103.406) 137.541,103.406 ccw(c138.585,103.406) J6.10@137.847,102.668 ; J8.10@137.847,51.764 cw(c138.585,51.026) 138.585,52.07 cw(c138.585,53.114) J8.10@137.847,52.376 ; 138.4,105.856 ccw(c137.235,107.021) 138.882,107.021 ccw(c137.235,107.021) 138.4,108.186 ; 138.883,106.339 cw(c139.365,105.856) S1.2@139.365,106.538 ; 138.883,107.703 ccw(c139.365,108.185) S1.2@139.365,107.503 ; J9.10@142.315,51.764 ccw(c141.577,51.026) 141.577,52.07 ccw(c141.577,53.114) J9.10@142.315,52.376 ; J9.10@142.621,52.502 ccw(c142.621,53.547) 143.359,52.808 ccw(c144.098,52.07) J9.10@143.053,52.07 ; J7.10@142.927,102.056 cw(c143.665,101.318) 143.665,102.362 cw(c143.665,103.406) J7.10@142.927,102.668
pads on no net: S1.1@132.565,111.521 S1.2@132.565,107.021 S2.1@125.715,48.745 S2.2@130.215,48.745 S3.1@118.603,48.618 S3.2@123.103,48.618 S4.1@111.491,48.745 S4.2@115.991,48.745 SPCE061A.10 SPCE061A.11 SPCE061A.14 SPCE061A.20 SPCE061A.29 SPCE061A.30 SPCE061A.31 SPCE061A.32 SPCE061A.39 SPCE061A.40 SPCE061A.61 SPCE061A.69 SPCE061A.70 SPCE061A.71 SPCE061A.72 SPCE061A.73 SPCE061A.74 SPCE061A.82 SPCE061A.83 SPCE061A.84 U3.4

## Polygon pours and split planes (outlines as drawn)
no net on Top Layer (hatched 45Degree grid 0.508 track 0.203): 82.931,112.649 84.074,113.792 147.447,113.792 148.463,112.776 148.463,46.355 147.447,45.339 83.82,45.339 82.931,46.228
no net on Bottom Layer (hatched 45Degree grid 0.508 track 0.203): 82.931,112.649 84.074,113.792 147.447,113.792 148.463,112.776 148.463,46.482 147.447,45.466 147.32,45.339 83.82,45.339 82.931,46.228

## Silkscreen, mask and mechanical layers (free items; w line width, h text height)
Top Overlay:
  lines w0.254: 146.431,46.736 146.558,46.609 146.558,47.117
  text "GND" at 88.265,108.077 h1.02
  text "RXD" at 144.653,108.077 h1.02
  text "TXD" at 144.526,104.775 h1.02
  text "VSS" at 133.096,102.108 h1.02
  text "VSS" at 144.526,101.981 h1.02
  text "IOB0" at 132.588,99.314 h1.02
  text "IOB8" at 144.145,99.314 h1.02
  text "IOB1" at 132.588,96.774 h1.02
  text "IOB9" at 144.145,96.774 h1.02
  text "IOB2" at 132.588,94.361 h1.02
  text "IOB10" at 144.145,94.107 h1.02
  text "IOB3" at 132.588,91.948 h1.02
  text "IOB11" at 144.145,91.567 h1.02
  text "IOB" at 140.716,89.408 h1.52 r90
  text "IOB4" at 132.588,89.154 h1.02
  text "IOB12" at 144.145,89.027 h1.02
  text "IOB5" at 132.588,86.614 h1.02
  text "IOB13" at 144.145,86.614 h1.02
  text "IOB6" at 132.588,84.201 h1.02
  text "IOB14" at 144.145,83.947 h1.02
  text "IOB7" at 132.588,81.661 h1.02
  text "IOB15" at 144.145,81.407 h1.02
  text "VDDH" at 132.461,78.867 h1.02
  text "VDDH" at 144.653,78.867 h1.02
  text "VDDH" at 132.461,74.549 h1.02
  text "VDDH" at 144.272,74.549 h1.02
  text "IOA7" at 132.588,71.755 h1.02
  text "IOA15" at 144.145,71.755 h1.02
  text "IOA6" at 132.588,69.342 h1.02
  text "IOA14" at 144.145,69.342 h1.02
  text "IOA5" at 132.588,66.802 h1.02
  text "IOA13" at 144.145,66.675 h1.02
  text "IOA4" at 132.588,64.262 h1.02
  text "IOA12" at 144.145,64.135 h1.02
  text "IOA3" at 132.588,61.722 h1.02
  text "IOA11" at 144.145,61.595 h1.02
  text "IOA" at 140.716,60.325 h1.52 r90
  text "IOA2" at 132.588,59.309 h1.02
  text "IOA10" at 144.145,59.055 h1.02
  text "IOA1" at 132.588,56.642 h1.02
  text "IOA9" at 144.145,56.642 h1.02
  text "IOA8" at 144.145,54.229 h1.02
  text "IOA0" at 132.588,54.102 h1.02
  text "VRT" at 83.693,52.324 h1.02
  text "VSS" at 144.653,51.562 h1.02
  text "VSS" at 132.969,51.435 h1.02
  text "VREF" at 82.804,49.53 h1.02
  text "SN:090810" at 134.366,46.609 h1.02
Mechanical 1:
  lines w0.254: 82.55,108.966 82.55,113.03 83.693,114.173 147.701,114.173 148.844,113.03 148.844,46.101 147.701,44.958 ; 82.55,109.474 82.55,46.101 83.693,44.958 147.692,44.949

## Text inside footprints (layer, text, board x,y; h text height)
SPCE061A: Top Overlay "74" at 127,90.424 h1.02; Top Overlay "54" at 126.873,61.722 h1.02; Top Overlay "12" at 96.52,90.678 h1.02; Top Overlay "32" at 96.52,62.357 h1.02; Top Overlay "11" at 99.187,93.98 h1.02; Top Overlay "75" at 124.079,93.853 h1.02; Top Overlay "33" at 98.933,59.055 h1.02; Top Overlay "53" at 124.333,58.801 h1.02